# Altium PCB zulu_a7_hdi_optimized.PcbDoc (part 3 of 4)
Units mm, origin at the board's own origin, x right, y up, seen from the top; angles counter-clockwise.
Board outline 69.85 x 25.4 mm, 6 copper layers (Top Layer, L2-GND, L3-SIG, L4-SIG, L5-VCC3V3, Bottom Layer), stack 1.65 mm thick; 178 components, 177 nets, 839 pads, 1771 vias.
Unrouted connection lines stored in the file: 143.
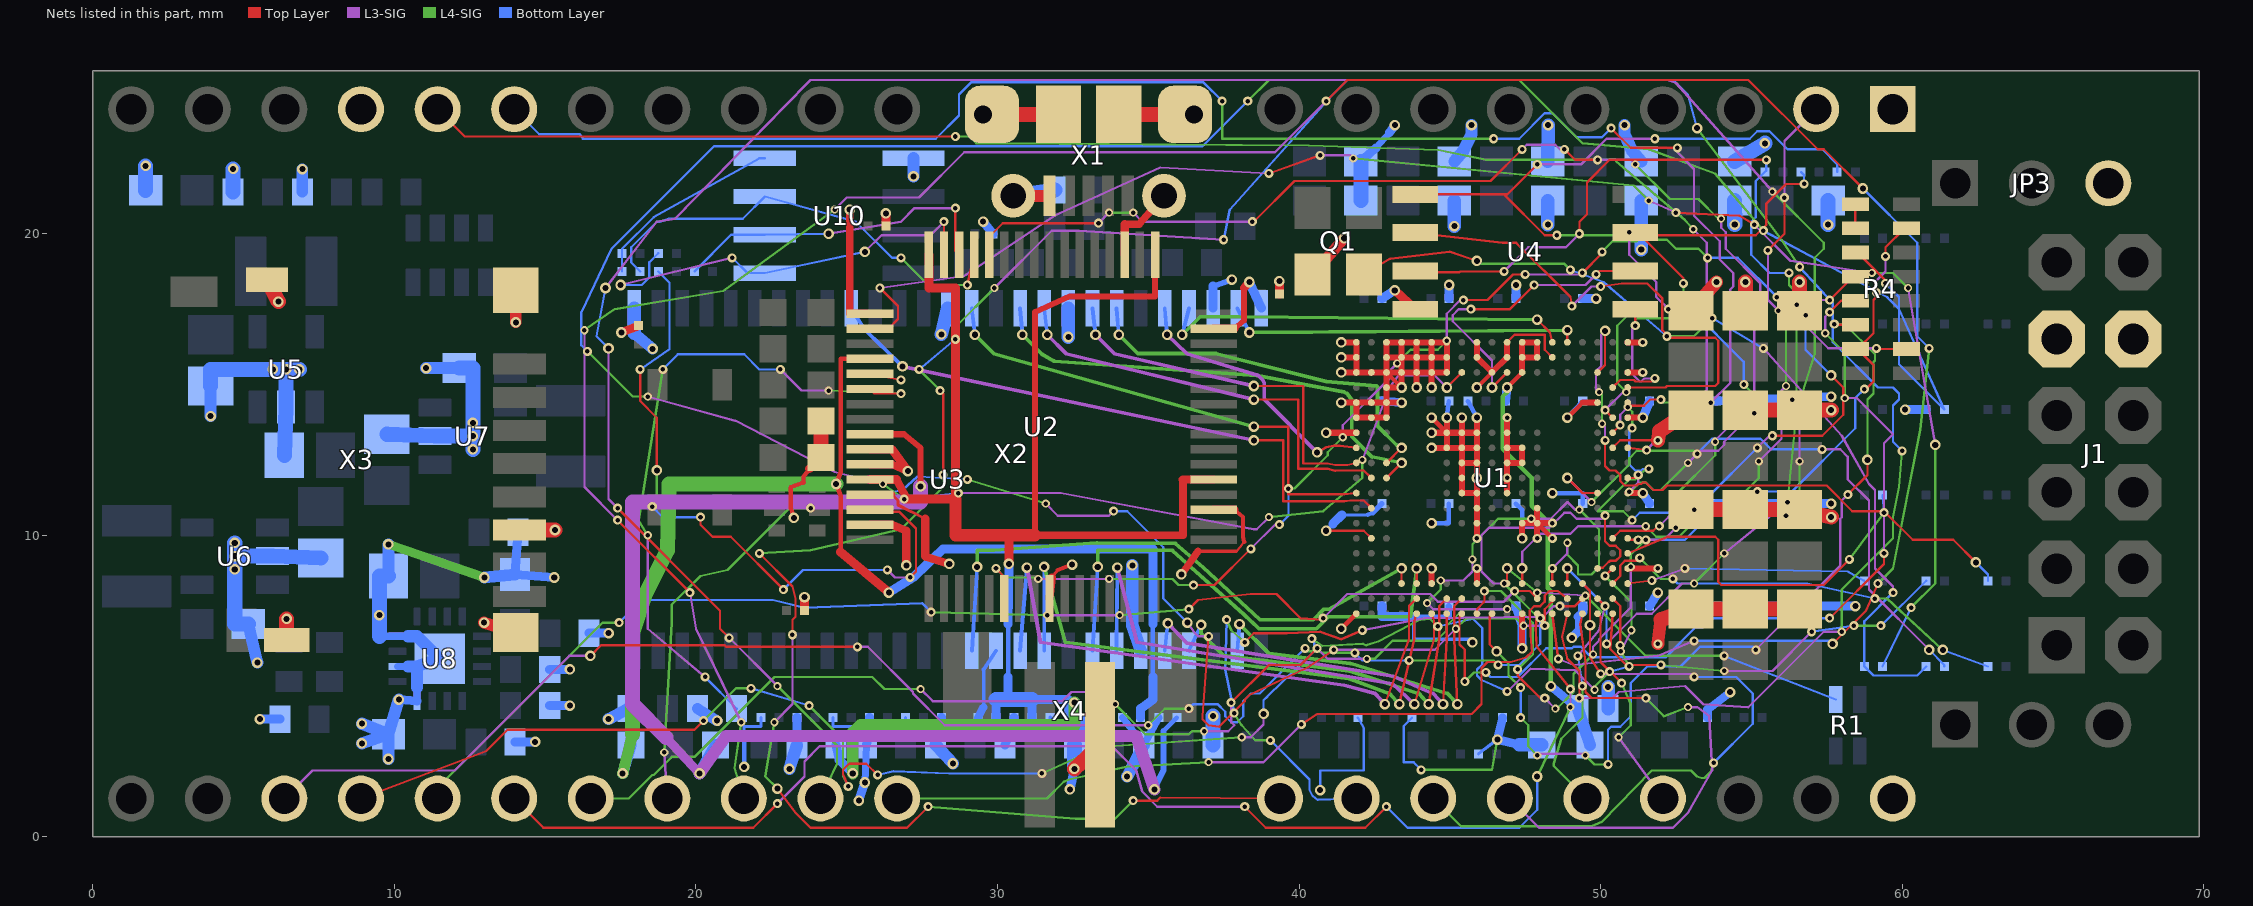
[diagram p6: the nets of this part, all layers, seen from the top]

## Via types
v1: diameter 0.35, hole 0.2, Top Layer to Bottom Layer, tented both sides, 392 vias
v2: diameter 0.27, hole 0.15, L3-SIG to L4-SIG, tented both sides, 363 vias
v3: diameter 0.3, hole 0.15, Top Layer to L2-GND, tented both sides, 292 vias
v4: diameter 0.3, hole 0.15, L2-GND to L3-SIG, tented both sides, 279 vias
v5: diameter 0.3, hole 0.15, L4-SIG to L5-VCC3V3, tented both sides, 223 vias
v6: diameter 0.3, hole 0.15, L5-VCC3V3 to Bottom Layer, tented both sides, 222 vias

## Nets (pads, with @x,y where several pads share a name; then routed paths per layer and width w, separated by ;. In a path a pad name is that pad's centre, name@x,y a point inside that pad or via, vN(x,y) a via of type N, cw(c..) or ccw(c..) an arc to the next point about the centre after c; other vN are vias at no path point) (continued)
CHAN12: U1.E19 X2.15 | length 55.2
  Top Layer w0.076: v3(50.35,23.5) 51,22.85 v3(52.55,22.85) ; U1.E19@50.9,14.4 51,14.3 51.45,14.3 51.65,14.5 v3(52,14.5)
  L3-SIG w0.076: v3(52.55,22.85) 52.55,22.7 53.1,22.15 53.1,20.6 53.95,19.75 53.95,19.15 54.4,18.7 54.4,18.25 54.3,18.15 54.3,15.05 v2(53.65,14.4)
  L4-SIG w0.076: v5(37.45,24.4) 37.45,23.15 v5(46.45,23.15) ; v3(52,14.5) 52.1,14.4 v2(53.65,14.4)
  Bottom Layer w0.076: X2.15@13.97,24.13 14.8,23.3 16.15,23.3 16.25,23.15 27.95,23.15 28.72,23.92 28.72,24.62 29.12,25.02 36.83,25.02 v5(37.45,24.4) ; v5(46.45,23.15) 47.3,23.15 48.15,24 48.4,24 49.2,23.2 50.05,23.2 v3(50.35,23.5)
  other v2: 52,14.5 50.35,23.5
  other v4: 52,14.5 52.55,22.85 50.35,23.5
  other v5: 50.35,23.5
  other v6: 46.45,23.15 50.35,23.5 37.45,24.4
CHAN13: U1.H19 X2.16 | length 52
  Top Layer w0.076: X2.16@11.43,24.13 12.335,23.225 v3(28.6,23.225) ; U1.H19@50.9,12.9 v3(51.525,12.825)
  L3-SIG w0.076: v3(51.525,12.825) 53.525,14.825 53.525,19.7 v2(53.075,20.15)
  L4-SIG w0.076: v3(28.6,23.225) 29.075,23.225 29.3,23 40.325,22.925 44.625,22.775 46.2,22.45 50.475,22.45 50.525,22.4 52.8,20.45 v2(53.075,20.15)
  other v2: 28.6,23.225
  other v4: 51.525,12.825 28.6,23.225
CHAN14: U1.W17 X2.24 | length 7.2
  Top Layer w0.076: U1.W17@49.9,7.4 50,7.3 50,5.8 v3(50.7,5.1)
  L3-SIG w0.076: v2(50.6,3.3) X2.24@52.07,1.27
  L4-SIG w0.076: v2(50.6,3.3) 51,3.7 51,4.4 v3(50.7,5.1)
  other v2: 50.7,5.1
  other v4: 50.7,5.1
CHAN15: U1.V17 X2.25 | length 7.8
  Top Layer w0.076: U1.V17@49.9,7.9 v3(50.15,7.65)
  L3-SIG w0.076: v2(49.25,6) 49.95,6.85 v3(50.15,7.65)
  L4-SIG w0.076: v5(49.4,5) 49.4,3.95 48.7,3.25 48.45,2.425 48.45,2.35 X2.25@49.53,1.27
  Bottom Layer w0.076: v2(49.25,6) v5(49.4,5)
  other v4: 50.15,7.65
  other v5: 49.25,6
  other v6: 49.4,5 49.25,6
CHAN16: U1.W16 X2.26 | length 17.1
  Top Layer w0.076: U1.W16@49.4,7.4 49.325,7.05 49.5,5.8 49.5,4.8 49.7,4.6 v3(51.5,4.6)
  L3-SIG w0.076: X2.26@46.99,1.27 47.96,0.3 52.4,0.3 52.9,0.8 53.7,2.2 53.6,4 53.2,4.3 v2(52.9,4.3)
  L4-SIG w0.076: v3(51.5,4.6) 52.1,4 v2(52.9,4.3)
  other v2: 51.5,4.6
  other v4: 51.5,4.6
CHAN17: U1.U16 X2.27 | length 22.2
  Top Layer w0.076: U1.U16@49.4,8.4 49.65,8.15 v1(49.65,7.02) 49.65,5.95 v3(50,5.4)
  L3-SIG w0.076: v3(50,5.4) 53,5.4 v2(53.1,5.3)
  L4-SIG w0.076: X2.27@44.45,1.27 45.37,0.35 49.7,0.35 50.05,0.5 51.7,2.2 53,2.2 53.2,2 53.35,1.95 53.45,1.95 53.65,2.15 v5(53.75,2.45)
  Bottom Layer w0.076: v2(53.1,5.3) 54.5,5.3 55.05,4.75 55.05,3.75 v5(53.75,2.45)
  other v4: 50,5.4
  other v5: 53.1,5.3
  other v6: 53.75,2.45 53.1,5.3
CHAN18: U1.V16 X2.28 | length 21.4
  Top Layer w0.076: v3(38.2,6.45) 38.5,6.75 39.6,6.75 40.7,6.8 41.4,6.55 v3(42.1,6.85) ; v3(48.65,7.65) 49.15,7.65 U1.V16@49.4,7.9
  L3-SIG w0.076: v3(42.1,6.85) 44.15,7.25 48.1,7.3 48.45,7.65 v3(48.65,7.65)
  L4-SIG w0.076: v5(37.6,7.2) 37.75,6.85 v3(38.2,6.45) ; v5(37.85,4.1) 38.1,3.7 38.55,3.2 v5(39.05,3.2)
  Bottom Layer w0.076: v5(37.6,7.2) 37.55,5.55 v5(37.85,4.1) ; v5(39.05,3.2) 40.35,1.9 40.35,1.55 40.45,1.35 40.625,1.225 X2.28@41.91,1.27
  other v2: 38.2,6.45
  other v4: 38.2,6.45 42.1,6.85 48.65,7.65
  other v6: 39.05,3.2 37.85,4.1 37.6,7.2
CHAN19: U1.W15 X2.29 | length 102.8
  Top Layer w0.076: v3(22.1,9.4) 23.2,8.3 23.3,7.9 23.3,7.3 23.2,7.2 v3(23.2,6.7) ; v1(22.7,1.6) 23.3,0.8 23.8,0.3 27,0.3 v3(27.7,1) ; v3(28.1,14.8) 28.2,14.7 v3(28.2,12) ; v3(34.5,1.2) 35.3,1.2 35.4,1.3 X2.29@39.37,1.27 ; U1.W15@48.9,7.4 48.725,6.625 48.9,5.9 49.3,5.5 v3(49.3,4.6)
  L3-SIG w0.076: v2(22.6,3.8) 23.2,4.4 v3(23.2,6.7) ; v2(29.9,18.2) 31.8,20.1 32.7,20.1 v2(37.5,19.8) ; v3(49.3,4.6) 50.4,4.6 50.6,4.8 52.8,5 53.4,4.4 54.9,4.3 57.4,6.8 v2(58,6.8)
  L4-SIG w0.076: v3(22.1,9.4) 23.8,9.5 26.8,10.2 28.2,11.6 v3(28.2,12) ; v2(22.6,3.8) 22.3,2 v1(22.7,1.6) ; v5(27.4,15.5) v3(28.1,14.8) ; v3(27.7,1) 32.6,0.6 33.9,0.6 v3(34.5,1.2) ; v5(28.6,16.5) 28.6,16.9 v2(29.9,18.2) ; v1(53.2,23.5) 56,19.8 v5(56.6,18.9) ; v2(58,6.8) 58,8.2 59.7,9.9 59.7,10.6 59.9,11.6 v5(60,12.8)
  Bottom Layer w0.076: v5(27.4,15.5) v5(28.6,16.5) ; v2(37.5,19.8) 37.7,20.8 41.1,24.6 41.6,25.1 52.4,25.1 52.9,24.6 v1(53.2,23.5) ; v5(56.6,18.9) 57.7,17.7 57.7,16.4 59.2,14.9 59.7,14.9 59.9,14.7 59.9,14.5 59.7,14.3 59.7,13.1 v5(60,12.8)
  other v2: 27.7,1 34.5,1.2 22.1,9.4 28.2,12 28.1,14.8
  other v4: 27.7,1 34.5,1.2 49.3,4.6 23.2,6.7 22.1,9.4 28.2,12 28.1,14.8
  other v5: 37.5,19.8
  other v6: 60,12.8 27.4,15.5 28.6,16.5 56.6,18.9 37.5,19.8
CHAN20: U1.V15 X2.30 | length 26.6
  Top Layer w0.076: v3(40.075,3.725) 40.6,4.075 45.725,4.075 46.05,4.4 46.05,5.6 46.25,5.8 47.025,5.8 47.525,5.95 47.725,6.125 47.675,6.7 47.65,7.475 47.65,7.5 47.8,7.65 48,7.65 48.15,7.8 48.15,8 48.3,8.15 48.575,8.15 U1.V15@48.9,7.9
  L3-SIG w0.076: v2(37,2.475) 38.825,2.475 v3(40.075,3.725)
  L4-SIG w0.076: X2.30@26.67,1.27 31.645,1.27 32.2,1.825 32.375,1.9 34.275,2.325 v2(37,2.475)
  other v4: 40.075,3.725
CHAN21: U1.U15 X2.31 | length 86.4
  Top Layer w0.076: v3(17.4,10.9) 20.8,7.5 20.8,6.9 v3(21.1,6.6) ; U1.U15@48.9,8.4 v1(48.9,8.9)
  L3-SIG w0.076: v1(17,18.2) 18.7,20.4 19.3,20.5 23.7,25 23.8,25.1 52.2,25.1 52.5,25 v2(55.7,21.4) ; v1(17.1,16.2) 17.1,11.2 v3(17.4,10.9) ; v3(21.1,6.6) v2(22.7,5) ; v2(50.2,6.4) 51.2,7.4 51.7,7.4 52.7,8.4 v2(53.1,8.4) ; v2(54.1,9.4) v2(56.2,11.1)
  L4-SIG w0.076: v2(22.7,5) 24.675,3.025 24.675,2.425 X2.31@24.13,1.27 ; v2(53.1,8.4) v2(54.1,9.4) ; v2(55.7,21.4) 57.4,19.7 57.4,19.5 57.1,19.2 57.1,16 56.5,14.1 v2(56.2,11.1)
  Bottom Layer w0.076: v1(17,18.2) 16.7,16.6 v1(17.1,16.2) ; v1(48.9,8.9) 50.2,7.6 v2(50.2,6.4)
  other v4: 21.1,6.6 17.4,10.9
  other v5: 50.2,6.4
  other v6: 50.2,6.4
CHAN22: U1.W14 X2.32 | length 91.9
  Top Layer w0.076: v3(17.4,10.5) v3(19.8,8.1) ; v3(40.9,24.4) 41.6,25.1 54.9,25.1 57.2,22.8 57.4,22.8 v1(58.7,21.5) ; U1.W14@48.4,7.4 v3(48.6,5.9) ; v1(57.7,6.4) 58.8,7.5 v3(59.2,8.4)
  L3-SIG w0.076: v2(16.3,16.8) 16.3,11.6 v3(17.4,10.5) ; v3(19.8,8.1) 20,6.9 v2(21.5,3.8) ; v2(24.6,20.8) 25,21.2 27.4,21.2 28.9,22.7 39.2,22.7 v3(40.9,24.4) ; v3(48.6,5.9) 49.1,5.7 51.9,6 v2(53.1,6.5)
  L4-SIG w0.076: v2(16.3,16.8) 17.3,17.5 20.9,18.1 v2(24.6,20.8) ; v2(21.5,3.8) 21.275,2.275 X2.32@21.59,1.27 ; v3(59.2,8.4) 59.7,8.9 60.6,13.5 v5(60.9,16.2)
  Bottom Layer w0.076: v2(53.1,6.5) 57.6,6.5 v1(57.7,6.4) ; v1(58.7,21.5) 60.5,19.7 60.5,16.6 v5(60.9,16.2)
  other v2: 59.2,8.4
  other v4: 48.6,5.9 19.8,8.1 59.2,8.4 17.4,10.5 40.9,24.4
  other v5: 53.1,6.5
  other v6: 53.1,6.5 60.9,16.2
CHAN23: U1.V14 X2.33 | length 45.4
  Top Layer w0.076: v3(37,6.65) 36.8,4 36.8,3.9 37,3.7 37.35,3.65 38.2,4.5 38.2,4.55 38.35,4.7 40.25,5.6 v3(41.15,6.2) ; v3(48.15,7) 48.15,7.55 48.4,7.8 U1.V14@48.4,7.9
  L3-SIG w0.076: v2(18.95,2.8) X2.33@19.05,1.27 ; v2(31.6,11.05) 32,10.65 33.7,10.65 v2(33.85,10.8) ; v1(36.3,7.1) 36.55,6.75 36.65,6.65 v3(37,6.65) ; v3(41.15,6.2) 44.5,6.2 v2(45.2,6.9) ; v2(47.45,7) v3(48.15,7)
  L4-SIG w0.076: v2(18.95,2.8) 19.2,7.1 19.2,7.7 20.15,8.65 21.05,8.85 23.1,10.9 v5(23.8,10.9) ; v5(29,11.85) v2(31.6,11.05) ; v2(45.2,6.9) 45.55,7.25 47.2,7.25 v2(47.45,7)
  Bottom Layer w0.076: v5(23.8,10.9) 26.85,11.5 27.35,11.95 v5(29,11.85) ; v2(33.85,10.8) 34.3,10.8 35.5,9.6 35.5,7.9 v1(36.3,7.1)
  other v4: 41.15,6.2 37,6.65 48.15,7
  other v5: 33.85,10.8
  other v6: 33.85,10.8 23.8,10.9 29,11.85
CHAN24: U1.U14 X2.34 | length 51.5
  Top Layer w0.076: v3(37.75,4.45) 39,5.7 40.05,5.7 v3(40.6,6.25) ; U1.U14@48.4,8.4 v3(48.4,8.9)
  L3-SIG w0.076: v2(27.45,4.9) 27.85,4.5 32.15,4.5 32.45,4.8 33.5,4.8 v2(33.9,4.4) ; v2(36.85,3.5) 37.65,3.5 37.85,3.7 37.75,3.8 v3(37.75,4.45) ; v3(40.6,6.25) 40.95,5.9 v2(42.25,5.9) ; v2(44.25,7.75) 44.45,7.55 v2(46.9,7.55) ; v2(44.7,8.5) 45.45,8.5 45.75,8.8 v2(45.75,9.2) ; v2(47.7,10.55) 48.35,10.55 48.9,11.1 49.15,10.85 v2(49.3,10.85) ; v3(48.4,8.9) 48.9,9.4 v2(48.9,9.75)
  L4-SIG w0.076: X2.34@16.51,1.27 17.77,1.27 18.55,2.05 18.6,2.05 19.2,2.65 19.95,2.65 22.6,5.3 25.85,5.3 26.25,4.9 v2(27.45,4.9) ; v2(33.9,4.4) 34.9,3.4 36.35,3.4 36.45,3.5 v2(36.85,3.5) ; v2(42.25,5.9) 42.5,5.9 43.1,6.5 44.55,6.5 44.9,6.85 44.9,7 45.45,7.55 v2(46.9,7.55) ; v2(44.25,7.75) 44.7,8.2 v2(44.7,8.5) ; v2(45.75,9.2) 45.75,9.7 46.6,10.55 v2(47.7,10.55) ; v2(48.9,9.75) 48.9,9.35 49.25,9 49.25,8.7 49.7,8.7 49.95,8.95 49.95,10.2 v2(49.3,10.85)
  other v4: 37.75,4.45 40.6,6.25 48.4,8.9
CHAN25: U1.W13 X2.35 | length 45.1
  Top Layer w0.076: X2.35@13.97,1.27 14.94,0.3 21.9,0.3 v3(22.7,1.1) ; v3(38.2,1) 38.9,0.3 42.2,0.3 v3(42.9,1) ; U1.W13@47.9,7.4 47.85,6.975 47.875,6.325 v3(49,4.9)
  L3-SIG w0.076: v3(22.7,1.1) 23.6,2 23.6,2.5 24.1,3 33.8,3 34.6,2.2 34.8,1.5 35.3,1 v3(38.2,1) ; v2(49,4.3) v3(49,4.9)
  L4-SIG w0.076: v1(47.9,2) v2(49,4.3)
  Bottom Layer w0.076: v3(42.9,1) 43.6,0.3 47.3,0.3 47.9,0.9 v1(47.9,2)
  other v2: 42.9,1
  other v4: 38.2,1 42.9,1 22.7,1.1 49,4.9
  other v5: 42.9,1
  other v6: 42.9,1
CHAN26: U1.V13 X2.36 | length 40.7
  Top Layer w0.076: v3(36.35,7.55) 36.65,7.85 38.4,8.05 39.25,8.05 40.05,7.25 40.75,7.2 v3(40.8,7.25) ; v3(47.15,8.15) 47.65,8.15 U1.V13@47.9,7.9
  L3-SIG w0.076: v2(31.65,7.35) v2(34.05,7.35) ; v3(40.8,7.25) 41.6,8.05 44.35,8.05 44.6,7.8 46.8,7.8 v3(47.15,8.15)
  L4-SIG w0.076: X2.36@11.43,1.27 11.43,1.63 16.9,7.1 v5(17.45,7.1) ; v5(27.8,7.45) v2(31.65,7.35) ; v2(34.05,7.35) v3(36.35,7.55)
  Bottom Layer w0.076: v5(17.45,7.1) 18.2,7.85 22.55,7.85 23.6,7.6 27.5,7.75 v5(27.8,7.45)
  other v2: 36.35,7.55
  other v4: 40.8,7.25 36.35,7.55 47.15,8.15
  other v6: 17.45,7.1 27.8,7.45
CHAN27: U1.T18 X2.37 | length 55.8
  Top Layer w0.076: X2.37@8.89,1.27 13.05,2.85 13.75,3.55 19.95,3.55 v3(20.25,3.85) ; v3(25.05,1.675) 24.875,2.075 24.875,2.225 25.075,2.425 25.65,2.425 v3(26.025,2.05) ; v3(50.15,8.65) U1.T18@50.4,8.9
  L3-SIG w0.076: v2(38.1,3.3) 38.4,3.3 38.825,3.725 v1(38.825,4.075) ; v2(46.9,4.825) 46.925,4.825 47.675,5.575 49.15,5.525 v2(49.8,4.875) ; v2(50.675,6.15) v2(51.025,6.85)
  L4-SIG w0.076: v3(20.25,3.85) 21.325,4.925 v5(21.825,4.925) ; v5(23.75,4.35) 24.875,3.225 24.875,2 v3(25.05,1.675) ; v5(31.475,2.1) 33.425,2.975 v2(38.1,3.3) ; v5(40.425,6.575) 40.775,6.325 42.125,6.4 42.225,6.35 42.625,6.475 44.025,7.2 44.35,7.225 v5(44.6,6.975) ; v2(49.8,4.875) 49.8,4.975 v5(50.3,5.475) ; v3(50.15,8.65) 51.025,7.775 v2(51.025,6.85) ; v2(50.675,6.15) v5(50.95,5.65)
  Bottom Layer w0.076: v5(21.825,4.925) v5(23.75,4.35) ; v3(26.025,2.05) 26.55,2.175 28.4,2.1 v5(31.475,2.1) ; v1(38.825,4.075) 38.825,4.525 38.95,4.65 40.5,6.15 40.5,6.5 v5(40.425,6.575) ; v5(44.6,6.975) 45.6,7.2 45.775,7.225 46.075,6.925 46.075,5.725 45.9,5.55 45.9,5.35 46.05,5.2 v2(46.9,4.825) ; v5(50.3,5.475) v5(50.95,5.65)
  other v2: 25.05,1.675 26.025,2.05 20.25,3.85 50.15,8.65
  other v4: 25.05,1.675 26.025,2.05 20.25,3.85 50.15,8.65
  other v5: 26.025,2.05 46.9,4.825
  other v6: 26.025,2.05 31.475,2.1 23.75,4.35 46.9,4.825 21.825,4.925 50.3,5.475 50.95,5.65 40.425,6.575 44.6,6.975
CHAN28: U1.T17 X2.38 | length 59.1
  Top Layer w0.076: v1(16.5,6) 16.85,6.35 20.95,6.35 21,6.3 v3(25.35,6.3) ; U1.T17@49.9,8.9 49.925,8.925 50.075,8.925 50.275,9.125 50.3,9.125 50.325,9.15 50.5,9.15 50.65,9.3 50.65,9.5 50.5,9.65 50.3,9.65 50.15,9.8 v3(50.15,10.65)
  L3-SIG w0.076: X2.38@6.35,1.27 7.28,2.2 12,2.2 15.8,6 v1(16.5,6) ; v3(25.35,6.3) 25.7,6.3 27.2,4.8 27.2,4.75 28.25,3.7 v2(35,3.7) ; v2(46.8,8.4) 46.45,8.4 46.05,8.8 46.05,10 46.3,10.25 48.3,10.25 48.8,10.75 49,10.75 49.2,10.55 50.05,10.55 v3(50.15,10.65)
  L4-SIG w0.076: v2(35,3.7) 35.55,4.25 v5(36.35,4.25) ; v5(40.2,6.25) 40.3,6.15 40.7,6.15 40.75,6.1 v5(41.85,6.1) ; v5(43.65,5.85) 46.45,5.85 v5(46.6,5.7) ; v2(46.8,8.4) 47.95,7.25 v5(48,7.25)
  Bottom Layer w0.076: v5(36.35,4.25) 36.5,4.4 37.3,4.4 37.55,4.15 37.55,4 37.75,3.8 37.95,3.8 38.15,4 38.15,4.5 38.4,4.75 38.7,4.75 v5(40.2,6.25) ; v5(41.85,6.1) 42.1,5.85 v5(43.65,5.85) ; v5(46.6,5.7) 47.3,5.7 48,6.4 v5(48,7.25)
  other v4: 25.35,6.3 50.15,10.65
  other v6: 36.35,4.25 46.6,5.7 43.65,5.85 41.85,6.1 40.2,6.25 48,7.25
CHAN-CLK: U1.P18 X2.2 | length 19.2
  Top Layer w0.076: U1.P18@50.4,9.9 50.65,10.15 51.75,10.15 51.9,10.3 v3(51.95,10.3) ; v3(55.55,19.45) 56.1,20 v3(56.1,21.2)
  L3-SIG w0.076: v3(51.95,10.3) 52.5,10.85 v2(53.1,10.85) ; v2(55.25,12.45) 56,13.2 56,14.8 v2(56.15,14.95) ; v3(55.55,19.45) 55.55,17.8 v2(55.9,17.45) ; v3(56.1,21.2) 56.1,23.08 X2.2@57.15,24.13
  L4-SIG w0.076: v2(53.1,10.85) 54.2,10.85 55.25,11.9 v2(55.25,12.45) ; v2(55.9,17.45) 56.15,17.2 v2(56.15,14.95)
  other v4: 51.95,10.3 55.55,19.45 56.1,21.2
CKE: U1.M2 U3.37 | length 20.5
  Top Layer w0.076: v1(38.5,13.15) 39.479,13.15 39.479,11.13 40.9,11.13 41.5,11.13 41.688,11.15 42.15,11.15 U1.M2@42.4,10.9
  L3-SIG w0.125: v1(26.85,15.6) v1(38.5,13.15)
  Bottom Layer w0.125: U3.37@25.15,17.53 25.575,16.85 v1(26.85,15.6)
CLK-12M-FPGA: R25.2 U1.L17 | length 20.4
  Top Layer w0.076: v1(48.9,11.9) 49.4,11.4 U1.L17@49.9,11.4
  L3-SIG w0.076: v1(48.9,11.9) v2(49.7,11.1) ; v2(57.35,12.85) 57.95,12.85 58.2,12.6 58.2,11.85 58.9,11.15 58.9,8.2 v1(60.9,6.2)
  L4-SIG w0.076: v2(49.7,11.1) 50.95,12.35 50.95,12.55 51.2,12.8 53.1,12.8 v5(53.2,12.7)
  Bottom Layer w0.076: v5(53.2,12.7) 53.7,13.2 55.3,13.2 55.65,12.85 v2(57.35,12.85) ; v1(60.9,6.2) 61.4,5.7 R25.2@61.4,5.65
  other v5: 57.35,12.85
  other v6: 53.2,12.7 57.35,12.85
CLK-12M-FT: R24.2 U2.2 | length 51.9
  Top Layer w0.076: U2.2@25.775,16.85 26.375,16.85 26.7,17.175 26.7,17.6 v3(26.1,18.2) ; v3(39,22) v3(40.7,22.6) ; v3(52.5,20.7) 54.6,20.6 v3(55.1,20.3)
  L3-SIG w0.076: v3(26.1,18.2) 28.9,18.6 31.9,20.6 35.4,22.2 v3(39,22) ; v3(40.7,22.6) 41.7,22.6 v2(41.8,22.5) ; v2(51.6,21.1) v3(52.5,20.7) ; v3(55.1,20.3) 56.3,19.1 v2(59,18.7) ; v2(60.2,18.2) v1(61.1,13)
  L4-SIG w0.076: v2(41.8,22.5) 51.1,21.6 v2(51.6,21.1) ; v2(59,18.7) 59.7,18.7 v2(60.2,18.2) ; v5(60.3,7.6) 61.1,8.4 v1(61.1,13)
  Bottom Layer w0.076: R24.2@59.35,5.65 v5(60.3,7.6)
  other v4: 26.1,18.2 55.1,20.3 52.5,20.7 39,22 40.7,22.6
  other v6: 60.3,7.6
CLK-12M-SHARED: Q1.3 R24.1 R25.1 | length 29.6
  Top Layer w0.076: Q1.3@42.15,18.65 43.025,19.175 45,19.4 v1(45.9,19.1)
  L3-SIG w0.076: v2(55.4,16.2) 58,13.3 58.9,11.7 59.1,11.5 59.1,8.9 59.7,8.3 v2(59.7,8.1)
  L4-SIG w0.076: v1(45.9,19.1) 46,19 48.8,19 v5(49,18.8) ; v5(52.2,16.6) 53.1,16.6 v5(53.7,17.2)
  Bottom Layer w0.076: v5(49,18.8) 50.1,18.4 v5(52.2,16.6) ; v5(53.7,17.2) v2(55.4,16.2) ; v2(59.7,8.1) 58.75,7.15 R24.1@58.75,5.65 59.05,5.35 60.5,5.35 R25.1@60.8,5.65
  other v5: 59.7,8.1 55.4,16.2
  other v6: 59.7,8.1 55.4,16.2 52.2,16.6 53.7,17.2 49,18.8
D0: U1.V8 U3.2 | length 12.4
  Top Layer w0.076: v1(45.25,4.4) 45.15,6.55 45.15,7.187 45.15,7.65 U1.V8@45.4,7.9
  L4-SIG w0.125: v1(38.025,7.05) 39,6.075 41.7,5.75 44.925,4.75 v1(45.25,4.4)
  Bottom Layer w0.125: U3.2@37.95,6.17 v1(38.025,7.05)
D1: U1.V7 U3.4 | length 13
  Top Layer w0.076: v1(44.3,4.4) 44.65,6.55 44.65,7.187 44.65,7.65 U1.V7@44.9,7.9
  L4-SIG w0.125: v1(36.75,7.025) 36.75,6.75 37.475,6.025 41.675,5.5 43.975,4.75 v1(44.3,4.4)
  Bottom Layer w0.125: U3.4@36.35,6.17 v1(36.75,7.025)
D2: U1.W7 U3.5 | length 13.7
  Top Layer w0.076: v1(44.775,4.4) 44.9,6.55 U1.W7@44.9,7.4
  L3-SIG w0.125: v1(35.65,7.075) 36.275,6.425 43.125,5.325 44.45,4.75 v1(44.775,4.4)
  Bottom Layer w0.125: U3.5@35.55,6.17 v1(35.65,7.075)
D3: U1.W6 U3.7 | length 18
  Top Layer w0.076: v1(43.825,4.4) 44.475,6.55 44.475,7.15 U1.W6@44.4,7.4
  L3-SIG w0.125: v1(33.975,8.925) 34.625,6.45 43.1,5.075 v1(43.825,4.4)
  Bottom Layer w0.125: U3.7@33.95,6.17 v1(33.975,8.925)
D4: U1.U5 U3.8 | length 17
  Top Layer w0.076: U1.U5@43.9,8.4 v1(43.9,8.9)
  L4-SIG w0.125: v1(33.325,8.95) 33.325,9.5 33.875,9.5 35.8,9.5 38.175,7.375 38.675,6.9 40.575,6.9 40.975,7.3 43.675,7.3 43.7,7.325 v1(43.9,8.9)
  Bottom Layer w0.125: U3.8@33.15,6.17 v1(33.325,8.95)
D5: U1.W5 U3.10 | length 19.8
  Top Layer w0.076: v1(43.325,4.4) 43.825,6.55 43.825,7.15 U1.W5@43.9,7.4
  L4-SIG w0.125: v1(31.55,8.95) 32.25,6.45 41.65,5.25 43,4.75 v1(43.325,4.4)
  Bottom Layer w0.125: U3.10@31.55,6.17 v1(31.55,8.95)
D6: U1.V5 U3.11 | length 20.7
  Top Layer w0.076: v1(42.85,4.4) 43.65,6.55 43.65,7.187 43.65,7.65 U1.V5@43.9,7.9
  L3-SIG w0.125: v1(30.975,8.925) 31.425,6.45 41.5,5.025 42.525,4.75 v1(42.85,4.4)
  Bottom Layer w0.125: U3.11@30.75,6.17 v1(30.975,8.925)
D7: U1.U4 U3.13 | length 19.4
  Top Layer w0.076: U1.U4@43.4,8.4 v1(43.4,8.9)
  L4-SIG w0.125: v1(29.325,8.95) 29.325,9.5 29.875,9.5 33.3,9.75 35.9,9.725 36.825,8.925 38.7,7.2 40.475,7.2 40.825,7.55 41,7.55 v1(43.4,8.9)
  Bottom Layer w0.125: U3.13@29.15,6.17 v1(29.325,8.95)
D8: U1.L1 U3.42 | length 16.4
  Top Layer w0.076: v1(38.5,13.6) 39.646,13.6 39.646,11.36 40.9,11.36 41.5,11.36 U1.L1@41.9,11.4
  L4-SIG w0.125: v1(29.25,16.65) 29.875,16.025 v1(38.5,13.6)
  Bottom Layer w0.125: U3.42@29.15,17.53 v1(29.25,16.65)
D9: U1.K3 U3.44 | length 16.2
  Top Layer w0.076: U1.K3@42.9,11.9 v1(43.4,12.4)
  L4-SIG w0.125: v1(30.825,16.65) 31.45,16.025 31.875,15.775 38.6,15.3 41.5,14.75 41.6,14.7 41.75,14.5 41.75,13.275 42.425,12.6 v1(43.4,12.4)
  Bottom Layer w0.125: U3.44@30.75,17.53 v1(30.825,16.65)
D10: U1.K2 U3.45 | length 14.5
  Top Layer w0.076: v1(38.5,14.5) 39.979,14.5 39.979,12.21 40.9,12.21 40.95,12.205 41.2,12.14 41.688,12.15 42.15,12.15 U1.K2@42.4,11.9
  L3-SIG w0.125: v1(31.65,16.65) 32.275,16.025 v1(38.5,14.5)
  Bottom Layer w0.125: U3.45@31.55,17.53 v1(31.65,16.65)
D11: U1.J1 U3.47 | length 12.5
  Top Layer w0.076: v1(38.5,14.95) 40.145,14.95 40.145,12.38 40.95,12.38 41.2,12.33 41.6,12.33 U1.J1@41.9,12.4
  L3-SIG w0.125: v1(33.25,16.65) 33.875,16.025 v1(38.5,14.95)
  Bottom Layer w0.125: U3.47@33.15,17.53 v1(33.25,16.65)
D12: U1.J3 U3.48 | length 12.9
  Top Layer w0.076: U1.J3@42.9,12.4 v1(43.4,12.9)
  L4-SIG w0.125: v1(34.025,16.65) 34.65,16.025 37.25,16.025 40.9,15.1 42.575,14.95 42.6,14.925 42.6,13.625 43.225,13 v1(43.4,12.9)
  Bottom Layer w0.125: U3.48@33.95,17.53 v1(34.025,16.65)
D13: U1.H1 U3.50 | length 9
  Top Layer w0.076: v1(40.6,12.75) 40.9,12.92 41.15,12.97 41.35,12.97 U1.H1@41.9,12.9
  L3-SIG w0.125: v1(35.625,16.65) 36.275,16.025 38.65,15.3 38.8,15.15 38.85,15.05 38.85,14.5 v1(40.6,12.75)
  Bottom Layer w0.125: U3.50@35.55,17.53 v1(35.625,16.65)
D14: U1.A14 U3.51 | length 13.9
  Top Layer w0.076: v1(47.9,17.15) 48.325,16.725 U1.A14@48.4,16.4
  L4-SIG w0.125: v1(36.125,16.65) 36.725,17.25 38,17.25 v1(47.9,17.15)
  Bottom Layer w0.125: v1(36.125,16.65) U3.51@36.35,17.53
D15: U1.A15 U3.53 | length 11.8
  Top Layer w0.076: U1.A15@48.9,16.4 v1(48.9,16.8)
  L4-SIG w0.125: v1(38.35,16.725) v1(48.9,16.8)
  Bottom Layer w0.125: U3.53@37.95,17.53 v1(38.35,16.725)
DONE: R4.2 U2.22 | length 39.3
  Top Layer w0.076: v3(29.95,8.9) 30.225,8.625 U2.22@30.225,7.9 ; v3(36.5,8.35) 37.2,8.35 v3(38.4,9.55) ; v3(45.45,17.8) 46.25,17.8 47.1,18.65 v3(47.5,18.65) ; v3(49.4,18.7) 50.05,19.35 v3(50.05,19.4) ; v3(59.15,16.2) 59.172,16.178 R4.2@60.15,16.178
  L3-SIG w0.076: v2(31.35,8.55) v2(33.7,8.55) ; v3(38.4,9.55) 39.2,10.35 v2(39.35,10.35) ; v2(41.45,13.25) 41.45,13.65 43.05,15.25 43.05,15.5 v2(43.25,15.7) ; v2(44.9,16.45) 44.9,17.35 45.35,17.8 v3(45.45,17.8) ; v3(47.5,18.65) 49.35,18.65 v3(49.4,18.7) ; v2(55.85,17.9) 57.55,16.2 v3(59.15,16.2)
  L4-SIG w0.076: v3(29.95,8.9) 30.25,8.6 31.3,8.6 v2(31.35,8.55) ; v2(33.7,8.55) 35.8,8.55 36,8.35 v3(36.5,8.35) ; v5(39.65,11.55) 39.85,11.55 40.95,12.65 40.95,12.75 v2(41.45,13.25) ; v2(43.25,15.7) 43.7,16.15 44.6,16.15 v2(44.9,16.45) ; v3(50.05,19.4) 50.4,19.75 51.2,19.75 51.25,19.8 52.2,19.8 52.5,19.5 53.25,19.5 v5(53.55,19.2)
  Bottom Layer w0.076: v2(39.35,10.35) 39.65,10.65 v5(39.65,11.55) ; v5(53.55,19.2) 54.55,19.2 v2(55.85,17.9)
  other v2: 36.5,8.35 29.95,8.9 50.05,19.4
  other v4: 36.5,8.35 29.95,8.9 38.4,9.55 59.15,16.2 45.45,17.8 47.5,18.65 49.4,18.7 50.05,19.4
  other v5: 39.35,10.35 55.85,17.9
  other v6: 39.35,10.35 39.65,11.55 55.85,17.9 53.55,19.2
DONE-PU: R4.9 R4.10 | length 0.8
  Top Layer w0.076: R4.10@58.45,20.178 R4.9@58.45,20.978
EE-CLK: R96.1 U2.62 U10.2 | length 11
  Top Layer w0.076: v3(28.6,20.85) 28.6,19.425 U2.62@28.725,19.3
  L3-SIG w0.076: v1(24.4,20) 26.8,20.4 27.25,20.85 v3(28.6,20.85)
  Bottom Layer w0.076: R96.1@19.95,18.75 21.165,19.965 U10.2@22.285,19.965 v1(24.4,20)
  other v4: 28.6,20.85
EE-CS: R98.1 U2.63 U10.1 | length 14.6
  Top Layer w0.076: U2.63@28.225,19.3 v3(28.225,20.4)
  L3-SIG w0.076: v1(17.5,18.3) v2(21.2,19.2) ; v1(25.6,19.4) 26.15,19.95 27.775,19.95 v3(28.225,20.4)
  Bottom Layer w0.076: v1(17.5,18.3) 18.2,18.3 18.45,18.55 18.45,19.05 R98.1@18.75,19.35 ; v2(21.2,19.2) 21.705,18.695 U10.1@22.285,18.695 v1(25.6,19.4)
  other v4: 28.225,20.4
  other v5: 21.2,19.2
  other v6: 21.2,19.2
EE-DATA: R101.2 U2.61 U10.3 | length 14.8
  Top Layer w0.076: v3(29,18.3) U2.61@29.225,19.3
  L4-SIG w0.076: v5(26.8,19.2) 27.7,18.3 v3(29,18.3)
  Bottom Layer w0.076: R101.2@18.15,18.75 17.85,19.05 17.85,19.55 18.7,20.4 18.8,20.4 19.1,20.5 21.55,20.5 U10.3@22.285,21.235 25.3,20.4 26.5,19.2 v5(26.8,19.2)
  other v2: 29,18.3
  other v4: 29,18.3
  other v6: 26.8,19.2
EE-DATA-DO: R97.1 R101.1 U10.4 | length 6.4
  Bottom Layer w0.076: R101.1@17.55,18.75 R97.1@17.55,19.35 17.55,19.5 18.6,20.55 22.1,22.5 U10.4@22.285,22.505
FLASH-CS#: R7.1 U1.K19 U4.1 | length 35
  Top Layer w0.076: U4.1@43.85,21.305 46.795,21.305 ; v3(47.9,22.3) 46.905,21.305 46.795,21.305 ; v3(48.55,19.95) 48.15,19.95 46.795,21.305 ; U1.K19@50.9,11.9 51.15,11.9 v3(51.25,12)
  L3-SIG w0.076: v3(47.9,22.3) 49.35,22.3 50.2,23.15 v2(51.8,23.15) ; v2(50.95,11.45) 51.25,11.75 v3(51.25,12) ; v2(50.95,20.05) 50.95,19.3 51.85,18.4 51.85,17.9 v2(52.25,17.5) ; v2(52.9,12.4) 53.3,12.8 53.9,12.8 54.1,13 54.1,13.1 55.05,14.05 v2(55.1,14.05)
  L4-SIG w0.076: v3(48.55,19.95) 50.85,19.95 v2(50.95,20.05) ; v2(50.95,11.45) 51,11.45 51.3,11.75 51.5,11.75 51.75,11.5 52,11.5 v2(52.9,12.4) ; v5(54.75,15) 55.1,14.65 v2(55.1,14.05)
  Bottom Layer w0.076: v2(51.8,23.15) 54.95,23.15 55.2,23.4 55.6,23.4 56.2,22.8 57.35,22.8 57.85,22.3 R7.1@57.849,22.05 ; v2(52.25,17.5) 53,17.5 54.75,15.75 v5(54.75,15)
  other v2: 48.55,19.95
  other v4: 51.25,12 48.55,19.95 47.9,22.3
  other v5: 52.25,17.5 51.8,23.15
  other v6: 54.75,15 52.25,17.5 51.8,23.15
FLASH-D00: U1.D18 U4.5 | length 4.6
  Top Layer w0.076: U1.D18@50.4,14.9 50.65,15.15 51.112,15.15 51.163,15.1 51.35,15.1 51.7,15.1 v3(51.8,15.2) ; v3(51.15,16.95) U4.5@51.15,17.495
  L3-SIG w0.076: v3(51.15,16.95) 51.05,16.85 51.05,15.35 51.3,15.1 51.35,15.1 51.45,15.2 v3(51.8,15.2)
  other v4: 51.8,15.2 51.15,16.95
FLASH-D01: U1.D19 U4.2 | length 17.2
  Top Layer w0.076: U4.2@43.85,20.035 46.75,19.7 47.2,19.7 49,17.9 v3(49.05,17.6) ; v3(50,18.25) 50.7,18.35 51.55,18.35 52.05,17.85 52.05,16.8 52.3,16.55 53.8,16.55 53.9,16.45 53.9,15.05 53.8,14.95 52.2,14.95 52.15,14.9 U1.D19@50.9,14.9
  L3-SIG w0.076: v3(49.05,17.6) 49.7,18.25 v3(50,18.25)
  other v4: 49.05,17.6 50,18.25
FLASH-D02: R2.1 U1.G18 U4.3 | length 40.4
  Top Layer w0.076: U4.3@43.85,18.765 43.89,18.725 45.325,18.725 45.35,18.75 v3(46.8,18.75) ; v3(49.3,20) 49.3,20.4 49.55,20.65 49.55,21.7 50.3,22.45 v3(55.5,22.45) ; U1.G18@50.4,13.4 v3(50.65,13.65) ; v3(55.7,13.3) 57.35,13.3 58.05,14 58.05,14.9 v1(57.65,15.3)
  L3-SIG w0.076: v3(46.8,18.75) 47.6,19.55 48.85,19.55 v3(49.3,20) ; v3(50.65,13.65) 50.65,14 v2(50.9,14.25) ; v2(55.2,12.9) 55.6,13.3 v3(55.7,13.3)
  L4-SIG w0.076: v2(50.9,14.25) 51.05,14.1 v5(51.05,13.55) ; v5(51.05,10.5) 50.75,10.8 49.9,10.8 50.95,11.85 51.15,11.85 51.5,12.2 v5(51.6,12.2) ; v5(56.25,18.7) 56.25,18.3 56.8,17.75 v5(56.8,17.3)
  Bottom Layer w0.076: v5(51.05,10.5) 51.3,10.75 53.45,10.75 53.55,10.85 53.55,11.25 v2(55.2,12.9) ; v5(51.05,13.55) 50.95,13.45 50.95,12.35 51.15,12.15 51.35,12.15 51.4,12.2 v5(51.6,12.2) ; v3(55.5,22.45) 55.5,22.101 R2.1@55.449,22.05 55.15,21.751 55.15,20.55 55,20.4 55,19.3 55.6,18.7 v5(56.25,18.7) ; v5(56.8,17.3) 56.8,16.15 v1(57.65,15.3)
  other v2: 55.5,22.45
  other v4: 55.7,13.3 50.65,13.65 46.8,18.75 49.3,20 55.5,22.45
  other v5: 55.2,12.9 55.5,22.45
  other v6: 51.05,10.5 51.6,12.2 55.2,12.9 51.05,13.55 56.8,17.3 56.25,18.7 55.5,22.45
FLASH-D03: R6.1 U1.F18 U4.7 | length 16.5
  Top Layer w0.076: v3(50.15,14.15) U1.F18@50.4,13.9 ; v3(52.75,18.35) 52.75,18.525 51.24,20.035 U4.7@51.15,20.035 51.235,19.95 55.15,19.95 55.5,20.3 55.5,21 56.15,21.65 v3(56.75,21.65)
  L3-SIG w0.076: v3(50.15,14.15) 50.75,14.75 v2(50.85,14.75)
  L4-SIG w0.076: v2(50.85,14.75) 50.55,15.05 50.55,16.95 50.9,17.3 51.1,17.3 51.2,17.2 52.35,17.2 52.75,17.6 v3(52.75,18.35)
  Bottom Layer w0.076: R6.1@56.649,22.05 56.75,21.949 v3(56.75,21.65)
  other v2: 52.75,18.35 56.75,21.65
  other v4: 50.15,14.15 52.75,18.35 56.75,21.65
  other v5: 56.75,21.65
  other v6: 56.75,21.65
FPGA-CCLK: U1.C11 U4.6 | length 10.3
  Top Layer w0.076: v3(45.7,17.5) 47,17.5 v3(47.8,18.3) ; v1(46.4,14.9) U1.C11@46.9,15.4 ; v3(49.85,18.65) 49.965,18.765 U4.6@51.15,18.765
  L3-SIG w0.076: v3(45.7,17.5) 45.3,17.5 45.1,17.3 45.1,17.1 46.4,15.8 v1(46.4,14.9) ; v3(47.8,18.3) 49.5,18.3 v3(49.85,18.65)
  other v4: 45.7,17.5 47.8,18.3 49.85,18.65
FPGA-DONE: R4.7 R4.15 U1.U12 | length 22
  Top Layer w0.076: U1.U12@47.4,8.4 v1(47.4,8.9) ; R4.15@58.45,16.178 R4.15@58.522,16.178 ; v3(58.75,14.85) 58.8,14.85 59.05,15.1 59.05,15.65 R4.15@58.522,16.178 ; v3(59.15,18.05) 59.15,17.9 59.05,17.8 59.05,16.7 R4.15@58.522,16.178 ; v3(59.45,19.25) 59.45,19.55 60.078,20.178 R4.7@60.15,20.178
  L3-SIG w0.076: v1(47.4,8.9) 47.4,9.45 48,10.05 49,10.05 49.25,10.3 v2(51.5,10.3) ; v3(59.15,18.05) 59.15,18.45 59.45,18.75 v3(59.45,19.25)
  L4-SIG w0.076: v2(51.5,10.3) 51.85,9.95 52.6,9.95 53.3,10.65 54.4,10.65 v5(55.2,11.45)
  Bottom Layer w0.076: v5(55.2,11.45) 56.35,11.45 58.45,13.55 58.45,14.55 v3(58.75,14.85)
  other v2: 58.75,14.85
  other v4: 58.75,14.85 59.15,18.05 59.45,19.25
  other v5: 58.75,14.85
  other v6: 55.2,11.45 58.75,14.85
FPGA-INIT#: R1.1 U1.U11 | length 12.8
  Top Layer w0.076: U1.U11@46.9,8.4 v1(46.9,8.9)
  L3-SIG w0.076: v2(47.9,8.1) v2(49.5,8)
  L4-SIG w0.076: v1(46.9,8.9) v2(47.9,8.1) ; v2(49.5,8) 51.5,6 v5(54.1,6)
  Bottom Layer w0.076: v5(54.1,6) R1.1@57.8,4.55
  other v6: 54.1,6
FPGA-TCK: R4.11 R5.2 U1.C8 | length 95.4
  Top Layer w0.076: v1(44.9,14.9) U1.C8@45.4,15.4 ; R4.11@58.45,19.378 58.522,19.378 59.45,18.45 v3(59.45,18.35)
  L3-SIG w0.076: v2(18.4,14.6) 21.3,13.8 24.6,12.1 v2(26.2,11.7) ; v2(28.7,11.4) 32.1,11.4 38.5,10.2 38.6,10.2 v2(39,10.6) ; v2(42.1,12.5) 43,14.9 43.3,15.3 44.5,15.3 v1(44.9,14.9)
  L4-SIG w0.076: v5(16.4,16.1) 17.9,14.6 v2(18.4,14.6) ; v2(26.2,11.7) v5(26.9,11.2) ; v5(38.3,24.4) 39,25.1 47.3,25.1 49.4,23 51.6,22.8 53.8,22 v5(55.4,20.1) ; v2(39,10.6) 40.8,10.8 42.1,11.9 v2(42.1,12.5)
  Bottom Layer w0.076: v5(16.4,16.1) 16.2,16.3 16.2,17.4 17.2,19.5 20.6,22.9 36.8,22.9 v5(38.3,24.4) ; v5(26.9,11.2) v2(28.7,11.4) ; v5(55.4,20.1) 59.5,17.9 59.9,17.5 ; v3(59.45,18.35) 59.9,17.9 59.9,17.5 ; 59.9,17.5 R5.2@61.4,14.17 59.9,15.67 59.9,17.5
  other v2: 59.45,18.35
  other v4: 59.45,18.35
  other v5: 28.7,11.4 59.45,18.35
  other v6: 26.9,11.2 28.7,11.4 16.4,16.1 59.45,18.35 55.4,20.1 38.3,24.4
FPGA-TDI: R4.14 U1.W10 | length 29.7
  Top Layer w0.076: U1.W10@46.4,7.4 46.325,7.325 46.325,6.375 v1(46.55,6.15) ; v3(57.75,17) 57.772,16.978 R4.14@58.45,16.978 ; v3(58.2,11.35) 58.85,12 v1(58.85,12.5)
  L3-SIG w0.076: v2(47.9,2.7) 47.95,2.75 49.45,2.75 v2(49.5,2.7) ; v2(55.15,6.2) 57.95,9 57.95,10.55 58,10.6 58,11.15 v3(58.2,11.35)
  L4-SIG w0.076: v1(46.55,6.15) 46.95,5.75 46.95,5.35 v5(47.35,4.95) ; v5(47.35,3.95) 47.6,3.7 47.6,3 v2(47.9,2.7) ; v2(49.5,2.7) 49.8,2.4 v5(50.25,2.4) ; v3(57.75,17) 58.1,17 59.1,16 59.1,15.8 59.05,15.75 59.05,14.7 58.85,14.5 v1(58.85,12.5)
  Bottom Layer w0.076: v5(47.35,3.95) v5(47.35,4.95) ; v5(50.25,2.4) 50.25,3.55 50.35,3.65 50.65,3.65 51,4 51,5.1 51.55,5.65 52.65,5.65 53.3,6.3 55.05,6.3 v2(55.15,6.2)
  other v2: 57.75,17
  other v4: 58.2,11.35 57.75,17
  other v5: 55.15,6.2
  other v6: 50.25,2.4 47.35,3.95 47.35,4.95 55.15,6.2
FPGA-TDO: R4.13 U1.W8 | length 29
  Top Layer w0.076: U1.W8@45.4,7.4 45.325,7.325 45.325,6.375 45.5,6.2 v3(45.5,5.15) ; v3(57.6,7.25) 59.4,9.05 v3(59.4,9.4) ; v3(57.6,17.4) 57.978,17.778 R4.13@58.45,17.778
  L3-SIG w0.076: v2(57.45,16.7) 57.45,17.25 v3(57.6,17.4) ; v2(58.1,14.55) 58.5,14.55 59.7,13.35 59.4,13.05 v3(59.4,9.4)
  L4-SIG w0.076: v3(45.5,5.15) 45.8,5.45 v5(46.2,5.45) ; v2(57.45,16.7) 58.1,16.05 v2(58.1,14.55)
  Bottom Layer w0.076: v5(46.2,5.45) 46.35,5.3 47.25,5.3 48.2,6.25 49.05,6.25 49.1,6.3 49.35,6.3 49.7,5.95 52.15,5.95 53.15,6.95 53.4,6.95 53.7,7.25 v3(57.6,7.25)
  other v2: 45.5,5.15 57.6,7.25
  other v4: 45.5,5.15 57.6,7.25 59.4,9.4 57.6,17.4
  other v5: 57.6,7.25
  other v6: 46.2,5.45 57.6,7.25
FPGA-TMS: R4.12 U1.W9 | length 28.1
  Top Layer w0.076: U1.W9@45.9,7.4 45.9,7.55 46.125,7.775 46.125,7.8 46.15,7.825 v3(46.15,8.15) ; v3(47.25,5.55) 47.25,5.35 48,4.6 v3(48.15,4.6) ; v3(57.6,17.8) 58.378,18.578 R4.12@58.45,18.578
  L3-SIG w0.076: v3(48.15,4.6) v2(48.5,4.25) ; v2(49.75,6.05) 49.75,6.3 49.95,6.5 49.95,6.55 51,7.6 v2(51,8.95) ; v2(56.35,14.5) 56.6,14.25 v2(56.6,12.45) ; v2(56.5,17.65) 56.65,17.8 v3(57.6,17.8)
  L4-SIG w0.076: v3(46.15,8.15) 46.7,8.15 47.75,7.1 47.75,6.05 v3(47.25,5.55) ; v2(48.5,4.25) 48.55,4.25 49.1,4.8 49.1,5.4 v2(49.75,6.05) ; v2(51,8.95) 51,9.35 v5(51.5,9.85) ; v5(56.15,10.65) 56.6,11.1 v2(56.6,12.45) ; v2(56.35,14.5) 56.35,14.55 56.5,14.7 v2(56.5,17.65)
  Bottom Layer w0.076: v5(51.5,9.85) 52.8,9.85 53.6,10.65 v5(56.15,10.65)
  other v2: 47.25,5.55 46.15,8.15
  other v4: 48.15,4.6 47.25,5.55 46.15,8.15 57.6,17.8
  other v6: 51.5,9.85 56.15,10.65
FT-PWREN#: U1.P19 U2.60 | length 41.1
  Top Layer w0.076: U2.60@29.725,19.3 29.725,19.9 30.175,20.35 v3(33.35,20.35) ; v3(38.45,20.4) 38.5,20.4 39.85,21.75 46.35,21.75 v3(47.4,22.8) ; v3(48.8,22.8) 49.15,22.45 v3(49.9,22.45) ; U1.P19@50.9,9.9 50.95,9.85 v3(51.25,9.85)
  L3-SIG w0.076: v3(33.35,20.35) v2(33.7,20.7) ; v2(34.5,20.7) 34.8,20.4 v3(38.45,20.4) ; v3(47.4,22.8) 47.55,22.95 48.5,22.95 48.65,22.8 v3(48.8,22.8) ; v3(49.9,22.45) 51,22.45 v2(51.15,22.3) ; v3(51.25,9.85) 52.1,9.85 v2(52.5,10.25) ; v2(53.8,13.1) 53.8,13.15 55.1,14.45 55.1,17.7 55.3,17.9 55.3,18.35 54.15,19.5 54.15,20.05 54,20.2 v2(54,20.5)
  L4-SIG w0.076: v2(33.7,20.7) v2(34.5,20.7) ; v2(51.15,22.3) 52.3,21.15 53.25,21.15 53.9,20.5 v2(54,20.5) ; v2(52.5,10.25) 52.5,11.35 53.8,12.65 v2(53.8,13.1)
  other v4: 51.25,9.85 33.35,20.35 38.45,20.4 49.9,22.45 47.4,22.8 48.8,22.8
FT-REF: R18.2 U2.6 | length 22.4
  Top Layer w0.076: U2.6@25.775,14.85 25.925,14.7 v3(26.8,14.7)
  L3-SIG w0.076: v2(18.4,10) 18.4,6.9 v2(20.3,5.3) ; v2(22.8,15.5) 23.5,14.8 v2(24.4,14.8)
  L4-SIG w0.076: v2(18.4,10) 18.1,10.5 v5(18.9,15.5) ; v2(24.4,14.8) v3(26.8,14.7)
  Bottom Layer w0.076: v5(18.9,15.5) 19.4,16 21.6,16 22.1,15.5 v2(22.8,15.5) ; v2(20.3,5.3) R18.2@21.35,4.25
  other v2: 26.8,14.7
  other v4: 26.8,14.7
  other v5: 20.3,5.3 22.8,15.5
  other v6: 20.3,5.3 18.9,15.5 22.8,15.5
FT-RESETN: R19.1 U2.14 | length 22.5
  Top Layer w0.076: v3(18.15,15.5) 18.15,14.45 18.7,13.9 v1(18.7,12.15) ; v3(20.15,10.6) 20.15,10.35 20.55,9.95 20.8,9.95 21.15,9.95 v3(22.9,8.2) ; U2.14@25.775,10.85 25.85,10.775 26.75,10.775 27.3,10.225 27.3,8.8 v3(27.1,8.6)
  L3-SIG w0.076: v2(26.35,8.85) 26.6,8.6 v3(27.1,8.6)
  L4-SIG w0.076: v5(18.55,10.95) 18.7,11.1 v1(18.7,12.15)
  Bottom Layer w0.076: v3(18.15,15.5) 19.125,16.175 19.125,18.375 R19.1@18.75,18.75 ; v5(18.55,10.95) 18.9,10.6 v3(20.15,10.6) ; v3(22.9,8.2) 23.55,8.85 v2(26.35,8.85)
  other v2: 22.9,8.2 20.15,10.6 18.15,15.5
  other v4: 22.9,8.2 27.1,8.6 20.15,10.6 18.15,15.5
  other v5: 22.9,8.2 26.35,8.85 20.15,10.6 18.15,15.5
  other v6: 22.9,8.2 26.35,8.85 20.15,10.6 18.55,10.95 18.15,15.5
FT-VCORE: C139.2 C152.2 C153.2 C154.2 U2.12 U2.37 U2.49 U2.64 | length 57.3
  Top Layer w0.2: 31.237,10 31.237,17.4 32.4,17.92 35.225,17.92 U2.49@35.225,19.3
  Top Layer w0.26: 31.237,10 36.15,10 36.15,11.85
  Top Layer w0.275: 26.65,11.85 27,11.2
  Top Layer w0.28: 36.15,11.85 U2.37@37.175,11.85
  Top Layer w0.3: U2.12@25.775,11.85 26.65,11.85 ; 27,11.2 28.6,11.2 28.6,18.2 27.725,18.2 U2.64@27.725,19.3 ; v1(30.375,9.05) 30.375,10
  Top Layer w0.4: 28.6,11.2 28.6,10 30.375,10 31.237,10
  L4-SIG w0.39: v1(25.2,2.1) 25.2,3.45
  L4-SIG w0.4: 25.2,3.45 25.45,3.7 32.55,3.7 v1(32.55,4.45)
  Bottom Layer w0.15: 30.35,5.3 30.35,7.05
  Bottom Layer w0.29: 24.75,2.55 v1(25.2,2.1)
  Bottom Layer w0.3: C139.2@24.65,3.05 24.75,2.55 ; C152.2@29.949,3.95 29.949,4.55 ; 30.35,4.55 30.35,5.3 ; 30.35,7.05 v1(30.375,9.05) ; C153.2@31.149,3.95 31.149,4.55 32.349,4.55 ; C154.2@32.349,3.95 32.349,4.55 ; v1(32.55,4.45) 32.349,4.55
  Bottom Layer w0.5: 29.949,4.55 30.35,4.55 31.149,4.55
FT-VPHY: C40.2 L4.1 U2.4 | length 41
  Top Layer w0.15: 24.8,9.45 24.8,11.3 v1(24.65,11.7) 24.8,12.1 24.8,15.85 U2.4@25.775,15.85
  Top Layer w0.3: 24.8,9.45 v1(26.4,8.1)
  L4-SIG w0.37: v1(17.57,2.1) 17.9,3.4
  L4-SIG w0.5: 17.9,3.4 17.9,6.8 18.3,8 19.05,9.5 19.1,11.7 v1(24.65,11.7)
  Bottom Layer w0.15: 35.15,5.3 35.15,7.05
  Bottom Layer w0.3: v1(26.4,8.1) 27.2,8.6 28.2,9.55 35.15,9.55 35.15,7.05 ; C40.2@34.749,3.95 34.749,4.25 35.15,4.55 35.15,5.3
  Bottom Layer w0.37: v1(17.57,2.1) L4.1@17.85,3.05
FT-VPLL: C41.2 L5.1 U2.9 | length 43.8
  Top Layer w0.2: U2.9@25.775,13.35 26.9,13.35 27.45,12.9 v1(27.45,11.625)
  L3-SIG w0.3: 19,3.3 v1(20.12,2.1)
  L3-SIG w0.39: v1(20.12,2.1) 21,3.35
  L3-SIG w0.4: 21,3.35 34.6,3.35 v1(35.2,1.575)
  L3-SIG w0.5: 19,3.3 17.9,4.4 17.9,7.4 17.9,11.1 27.45,11.1 v1(27.45,11.625)
  Bottom Layer w0.15: 35.5,3.5 C41.2@35.949,3.95
  Bottom Layer w0.2: v1(35.2,1.575) 35.5,2.2 35.5,3.5
  Bottom Layer w0.39: v1(20.12,2.1) L5.1@20.65,3.05
GND: C3.1 C4.1 C5.1 C6.1 C7.1 C8.1 C9.1 C11.1 C12.1 C13.1 C38.1 C40.1 C41.1 C78.1 C80.1 C82.1 C84.1 C85.2 C86.2 C87.2 C88.2 C89.2 C90.2 C91.2 C92.2 C93.2 C94.2 C95.2 C96.2 C97.2 C98.2 C99.2 C100.2 C101.2 C102.2 C103.2 C104.2 C105.2 C106.2 C107.2 C108.2 C109.2 C110.2 C111.2 C112.2 C113.2 C114.2 C115.2 C116.2 C117.2 C118.2 C119.2 C120.2 C121.2 C122.2 C133.1 C134.1 C135.1 C136.1 C137.1 C138.1 C139.1 C140.2 C141.2 C142.2 C143.2 C144.2 C145.2 C146.2 C147.1 C148.1 C149.1 C150.1 C151.1 C152.1 C153.1 C154.1 C155.1 C156.1 C157.1 C158.1 C159.1 J1.5 J1.11 JP3.3 L6.1 LD1.K LD2.K Q1.2 R5.1 R11.1 R13.2 R15.1 R17.2 R18.1 R21.1 R22.1 R78.1 R86.1 R102.1 R103.1 R104.1 R105.1 R106.1 U1.A1 U1.A3 U1.A4 U1.A5 U1.A6 U1.A7 U1.A9 U1.A11 U1.A19 U1.B1 U1.B3 U1.B4 U1.B5 U1.B6 U1.B7 U1.B9 U1.B11 U1.B14 U1.C1 U1.C2 U1.C3 U1.C4 U1.C5 U1.C6 U1.C7 U1.C10 U1.C19 U1.D3 U1.E1 U1.E2 U1.E3 U1.E17 U1.F1 U1.F2 U1.F3 U1.F19 U1.G1 U1.G7 U1.G8 U1.G9 U1.G11 U1.H7 U1.H8 U1.H9 U1.H11 U1.H12 U1.H18 U1.J8 U1.J9 U1.J11 U1.J12 U1.K8 U1.L8 U1.L9 U1.L11 U1.L19 U1.M9 U1.M13 U1.N9 U1.N12 U1.N13 U1.P2 U1.T19 U1.U6 U1.U9 U1.V18 U1.W1 U1.W12 U2.1 U2.5 U2.10 U2.11 U2.13 U2.15 U2.25 U2.35 U2.47 U2.51 U3.6 U3.12 U3.28 U3.41 U3.46 U3.52 U3.54 U4.4 U5.2 U6.2 U7.2 U8.4 U8.6 U8.8 U8.17 U10.5 X1.5 X1.MH1 X1.MH2 X1.MP1 X1.MP2 X1.MP3 X1.MP4 X1.MS1 X1.MS2 X2.1 X2.17 X2.21 X3.6 X3.G1 X3.G2 X3.G3 X3.G4 X4.2 | length 271.4
  Top Layer w0.076: U2.5@25.775,15.35 v3(26.8,15.15) ; 37.93,9.47 38.056,9.622 38.18,9.78 ; v1(40.9,10.15) 42.15,10.15 U1.P2@42.4,9.9 ; U1.A11@46.9,16.4 47.15,16.65 48.15,16.65 48.15,16.15 U1.B14@48.4,15.9 ; U1.V18@50.4,7.9 50.65,7.65 v3(50.65,6.35) ; U1.H18@50.4,12.9 50.65,13.15 v3(51.9,13.15)
  Top Layer w0.1: U2.13@26.5,11.35 26.7,11.15 26.7,11 27.6,10.55
  Top Layer w0.105: 36.65,9.47 37.93,9.47
  Top Layer w0.11: U2.25@31.8,8.6 32,8.85
  Top Layer w0.13: U2.35@37.85,10.85 38.14,10.6 38.14,9.95
  Top Layer w0.14: 23.57,11.75 23.57,11.95 LD1.K@23.76,12.2 ; 38.14,9.95 38.18,9.78
  Top Layer w0.145: 32,8.85 v1(32.475,9.025)
  Top Layer w0.15: v1(23.25,10.575) 23.15,10.9 23.15,11.6 23.57,11.75 ; v1(41.4,6.9) U1.W1@41.9,7.4 ; U1.C3@42.9,15.4 v1(43.4,14.9) ; v1(44.4,13.9) U1.G7@44.9,13.4 ; v1(45.9,14.9) U1.C10@46.4,15.4 ; U1.N13@47.9,10.4 v3(48.4,9.9) ; v1(48.9,13.9) 49.4,14.4
  Top Layer w0.18: U2.47@37.85,16.85 38.175,17.125
  Top Layer w0.2: v1(40.9,13.4) U1.G1@41.9,13.4 ; v1(41.4,14.4) U1.E1@41.9,14.4 ; v1(41.4,15.4) U1.C1@41.9,15.4 ; v1(41.4,15.9) U1.B1@41.9,15.9 ; v1(41.4,16.4) U1.A1@41.9,16.4 U1.B1@41.9,15.9 ; v1(43.4,14.4) U1.E3@42.9,14.4 ; v1(43.9,14.9) U1.C5@43.9,15.4 ; U1.U6@44.4,8.4 v1(44.4,8.9) ; v1(44.4,12.9) U1.H7@44.9,12.9 ; v1(44.4,13.4) U1.G7@44.9,13.4 ; v1(44.4,14.9) U1.C6@44.4,15.4 ; v1(44.9,13.9) U1.G7@44.9,13.4 ; v1(45.4,13.9) U1.G8@45.4,13.4 ; U1.U9@45.9,8.4 v3(45.9,8.9) ; v3(45.9,9.9) U1.N9@45.9,10.4 U1.M9@45.9,10.9 U1.L9@45.9,11.4 ; v1(45.9,13.9) U1.G9@45.9,13.4 ; U1.A9@45.9,16.4 U1.B9@45.9,15.9 U1.C10@46.4,15.4 U1.B11@46.9,15.9 U1.A11@46.9,16.4 ; U1.L11@46.9,11.4 v3(46.9,11.9) U1.J11@46.9,12.4 ; v3(46.9,13.9) U1.G11@46.9,13.4 U1.H11@46.9,12.9 ; v1(47.4,6.25) U1.W12@47.4,7.4 ; v1(47.4,9.9) U1.N12@47.4,10.4 U1.N13@47.9,10.4 ; v3(47.9,9.9) U1.N13@47.9,10.4 ; U1.M13@47.9,10.9 U1.N13@47.9,10.4 ; v3(48.4,10.4) U1.N13@47.9,10.4 ; 49.4,14.4 U1.E17@49.9,14.4 ; U1.T19@50.9,8.9 v3(51.9,8.9) ; U1.L19@50.9,11.4 v1(51.4,11.4) ; U1.F19@50.9,13.9 v1(51.4,13.9) ; U1.C19@50.9,15.4 v3(51.4,15.4) ; U1.A19@50.9,16.4 v3(51.4,16.4) ; U1.E1@41.9,14.4 U1.F1@41.9,13.9 U1.F2@42.4,13.9 U1.F3@42.9,13.9 ; U1.E1@41.9,14.4 U1.E2@42.4,14.4 U1.E3@42.9,14.4 ; U1.C1@41.9,15.4 U1.C2@42.4,15.4 U1.C3@42.9,15.4 ; U1.C1@41.9,15.4 U1.B1@41.9,15.9 ; U1.F3@42.9,13.9 U1.E3@42.9,14.4 ; U1.F3@42.9,13.9 U1.E3@42.9,14.4 ; U1.E3@42.9,14.4 U1.D3@42.9,14.9 ; U1.D3@42.9,14.9 U1.C3@42.9,15.4 ; U1.D3@42.9,14.9 v1(43.4,14.9) U1.C4@43.4,15.4 ; U1.C3@42.9,15.4 U1.B3@42.9,15.9 ; U1.C3@42.9,15.4 U1.C4@43.4,15.4 ; U1.B3@42.9,15.9 U1.B4@43.4,15.9 ; U1.B3@42.9,15.9 U1.A3@42.9,16.4 U1.A4@43.4,16.4 ; U1.C4@43.4,15.4 U1.B4@43.4,15.9 ; U1.C4@43.4,15.4 U1.C5@43.9,15.4 ; U1.B4@43.4,15.9 U1.B5@43.9,15.9 ; U1.B4@43.4,15.9 U1.A4@43.4,16.4 ; U1.A4@43.4,16.4 U1.A5@43.9,16.4 ; U1.C5@43.9,15.4 U1.B5@43.9,15.9 ; U1.C5@43.9,15.4 U1.C6@44.4,15.4 ; U1.B5@43.9,15.9 U1.B6@44.4,15.9 ; U1.B5@43.9,15.9 U1.A5@43.9,16.4 ; U1.A5@43.9,16.4 U1.A6@44.4,16.4 ; U1.C6@44.4,15.4 U1.B6@44.4,15.9 ; U1.C6@44.4,15.4 U1.C7@44.9,15.4 ; U1.C6@44.4,15.4 U1.C7@44.9,15.4 ; U1.B6@44.4,15.9 U1.B7@44.9,15.9 ; U1.B6@44.4,15.9 U1.A6@44.4,16.4 ; U1.A6@44.4,16.4 U1.A7@44.9,16.4 U1.B7@44.9,15.9 ; U1.H7@44.9,12.9 U1.H8@45.4,12.9 ; U1.H7@44.9,12.9 U1.G7@44.9,13.4 ; U1.G7@44.9,13.4 U1.G8@45.4,13.4 ; U1.C7@44.9,15.4 U1.B7@44.9,15.9 ; U1.J8@45.4,12.4 U1.K8@45.4,11.9 U1.L8@45.4,11.4 U1.L9@45.9,11.4 ; U1.J8@45.4,12.4 U1.J9@45.9,12.4 ; U1.J8@45.4,12.4 U1.H8@45.4,12.9 ; U1.H8@45.4,12.9 U1.H9@45.9,12.9 ; U1.H8@45.4,12.9 U1.G8@45.4,13.4 ; U1.G8@45.4,13.4 U1.G9@45.9,13.4 ; U1.L9@45.9,11.4 v1(45.9,11.9) U1.J9@45.9,12.4 ; U1.J9@45.9,12.4 U1.H9@45.9,12.9 ; U1.H9@45.9,12.9 U1.G9@45.9,13.4 ; U1.J11@46.9,12.4 U1.J12@47.4,12.4 U1.H12@47.4,12.9 U1.H11@46.9,12.9 ; U1.J11@46.9,12.4 U1.H11@46.9,12.9
  Top Layer w0.21: 38.175,17.125 38.175,18.2
  Top Layer w0.22: U2.13@25.775,11.35 U2.13@26.5,11.35
  Top Layer w0.24: v1(36.1,8.7) 36.65,9.47
  Top Layer w0.245: 34.225,20.32 34.7,20.32 X1.MH2@35.52,21.258
  Top Layer w0.26: v1(25.1,20.8) 25.1,17.35 U2.1@25.775,17.35 ; U2.11@26.5,12.35 v1(27.025,12.125)
  Top Layer w0.27: U2.25@31.725,7.9 U2.25@31.8,8.6
  Top Layer w0.28: LD1.K@23.76,12.2 LD1.K@24.15,12.585 ; U2.15@25.775,10.35 26.5,10.35 26.975,10.15 v1(26.975,9) ; U2.11@25.775,12.35 U2.11@26.5,12.35 ; U2.10@25.775,12.85 26.5,12.85 v1(27.025,12.125) ; 27.6,10.55 27.6,9.3 v1(28.4,9.05) ; U2.51@34.225,19.3 34.225,20.32 ; U2.35@37.175,10.85 U2.35@37.85,10.85 ; U2.47@37.175,16.85 U2.47@37.85,16.85 ; 38.175,18.2 v1(38.35,18.4)
  Top Layer w0.3: v1(17.525,16.725) C158.1@18.1,16.95 ; C159.1@23.6,7.5 v1(23.6,7.95) ; C155.1@26.3,20.25 v1(26.3,20.675) ; C157.1@39.35,18 v1(39.35,18.425) ; v1(43.175,18.125) U4.4@43.85,17.495
  Top Layer w0.365: Q1.2@40.45,18.65 v1(41.5,19.85)
  Top Layer w0.38: v1(14.025,17.06) X3.G4@14.025,18.125
  Top Layer w0.4: v1(12.975,7.1) X3.G1@14.025,6.775 ; X1.MH1@30.52,21.258 X1.5@31.72,21.258
  Top Layer w0.425: v3(51.9,6.4) 52,7.2
  Top Layer w0.43: C93.2@53,17.449 v1(53.85,18.4)
  Top Layer w0.465: v3(51.9,13.15) 51.95,13.45
  Top Layer w0.5: X3.G3@5.775,18.475 v1(6.15,17.75) ; X3.G2@6.425,6.525 v1(6.425,7.225) ; X3.6@14.15,10.175 v1(15.325,10.175) ; LD1.K@24.15,12.585 LD2.K@24.15,13.785 ; X1.MS1@29.52,23.959 X1.MP2@32.02,23.959 ; v1(32.55,2.25) X4.2@33.4,3.05 ; X1.MP3@34.02,23.959 X1.MS2@36.52,23.959 ; 51.95,13.45 C146.2@53,14.149 ; 52,7.2 C140.2@53,7.55 C141.2@54.8,7.55 C142.2@56.6,7.55 ; C143.2@53,10.849 C144.2@54.8,10.849 C145.2@56.6,10.849 v1(57.65,10.6) ; C85.2@54.8,14.149 C86.2@56.6,14.149 v1(57.65,14.149) ; C97.2@54.8,17.449 v1(54.8,18.4) ; C98.2@56.6,17.449 v1(56.6,18.4)
  L4-SIG w0.076: v5(44.05,2.22) 46.4,2.22 v1(46.575,3.225)
  L4-SIG w0.3: v1(9.8,9.7) v1(12.98,8.6)
  Bottom Layer w0.076: v1(40.7,1.55) 40.7,2.2 42.15,2.2 42.15,3.6 R13.2@41.95,3.95 ; R15.1@43.75,3.95 43.47,3.671 43.47,2.47 43.8,2.47 v5(44.05,2.22)
  Bottom Layer w0.1: 21.6,3.45 21.6,3.65 22.15,3.65 C133.1@22.15,3.95 ; C135.1@24.55,3.95 24.55,3.65 25.75,3.65 26.95,3.65 C137.1@26.95,3.95 ; C152.1@29.349,3.95 29.35,3.65 30.5,3.65 31.75,3.65 C154.1@31.749,3.95
  Bottom Layer w0.105: R11.1@45.95,2.75 v1(46.575,3.225)
  Bottom Layer w0.11: 41.425,10.675 42.275,10.675 ; 43.8,7.3 43.8,6.55 45.65,6.55 v1(45.75,6.45)
  Bottom Layer w0.115: 29.54,4.3 29.54,5.55
  Bottom Layer w0.13: 29.54,5.55 U3.12@29.95,6.17 ; C154.1@31.749,3.95 C6.1@32.55,3.05 ; v1(40.9,10.15) 41.125,10.375
  Bottom Layer w0.145: 42.275,10.675 42.45,10.75
  Bottom Layer w0.15: v1(21.6,2.316) 21.6,3.45 ; v1(44.4,10.4) 44.97,10.4 C90.2@44.97,11.05 ; v1(44.9,13.9) C96.2@44.97,14.45 ; C92.2@45.6,14.45 v1(45.9,13.9) ; C89.2@47.19,11.05 47.4,10.84 v1(47.4,9.9) ; v1(48.4,11.4) 49.41,11.4 C91.2@49.41,11.05 ; v1(48.9,13.9) C95.2@49.41,14.45
  Bottom Layer w0.16: 43.8,7.3 44.97,7.3
  Bottom Layer w0.18: 42.45,10.75 C108.2@42.75,11.05
  Bottom Layer w0.205: 37.15,18.26 v1(37.775,18.475)
  Bottom Layer w0.21: C106.2@42.55,22.85 43,23.35 ; 44.97,7.3 C109.2@44.97,7.65 ; 49.25,6.8 49.25,7.3
  Bottom Layer w0.23: v1(25.6,1.8) C3.1@25.65,3.05 ; C40.1@34.149,3.95 C7.1@34.85,3.05
  Bottom Layer w0.24: 9.5,6.65 U8.8@10.1,6.65 10.45,6.65 ; U8.6@10.1,5.65 10.45,5.65 ; U8.4@10.75,4.5 10.75,4.95
  Bottom Layer w0.255: C152.1@29.349,3.95 29.54,4.3
  Bottom Layer w0.26: C7.1@34.85,3.05 C41.1@35.349,3.95
  Bottom Layer w0.265: 53.55,4.22 v1(54.3,4.8)
  Bottom Layer w0.28: 49.25,7.3 49.41,7.45
  Bottom Layer w0.29: v1(46.575,3.225) R17.2@46.75,3.95
  Bottom Layer w0.295: v1(46.575,3.225) 47.3,3.05
  Bottom Layer w0.3: v1(5.535,3.9) R78.1@6.2,3.9 ; v1(10.15,4.55) U8.4@10.75,4.5 ; R106.1@14.001,3.147 v1(14.667,3.147) ; R103.1@14.1,10.1 C150.1@14.002,8.7 v1(15.3,8.6) ; R102.1@15.151,4.349 v1(15.817,4.349) ; R105.1@15.151,5.55 v1(15.817,5.55) ; R104.1@16.453,6.752 v1(17.103,6.752) ; C139.1@23.35,3.05 C134.1@23.35,3.95 ; v1(25.4,1.2) v1(25.6,1.8) ; C3.1@25.65,3.05 25.75,3.65 C136.1@25.75,3.95 ; C4.1@27.95,3.05 C138.1@28.15,3.95 ; v1(29.525,20.4) C156.1@29.85,20 ; C5.1@30.25,3.05 30.5,3.65 C153.1@30.549,3.95 ; v1(32.4,1.575) v1(32.55,2.25) ; C6.1@32.55,3.05 C38.1@32.949,3.95 ; U3.52@37.15,17.53 37.15,18.26 ; v1(38.35,18.4) U3.54@38.75,17.53 ; 41.125,10.375 41.425,10.675 ; C106.2@42.05,22.4 C106.2@42.55,22.85 ; C113.2@42.75,7.65 42.75,7.3 43.8,7.3 ; C112.2@42.75,14.45 v1(43.4,14.4) ; C120.2@42.75,17.85 v1(43.175,18.125) ; 43,23.35 v1(43.18,23.6) ; C117.2@44.97,17.85 v1(44.975,18.3) ; C107.2@47.19,7.65 47.4,7 v1(47.4,6.25) ; C116.2@47.19,17.85 v1(47.2,18.3) ; v1(49.05,6.6) 49.25,6.8 ; 49.41,7.45 C110.2@49.41,7.65 ; C118.2@49.41,17.85 v1(49.85,17.85) ; v1(51.4,11.4) C111.2@51.63,11.05 ; v1(51.4,13.9) C114.2@51.63,14.45 ; C115.2@51.63,7.65 v1(51.9,8.1) ; R22.1@53.55,3.95 53.55,4.22 ; C122.2@53.85,7.65 v1(58.45,7.65) ; C119.2@53.85,11.05 v1(57.65,11.05) ; C121.2@53.85,14.45 v1(57.65,14.6) ; v1(60.1,14.17) R5.1@60.8,14.17
  Bottom Layer w0.36: R18.1@20.05,4.25 v1(20.7,3.85)
  Bottom Layer w0.37: 17.95,16.7 v1(18.56,16.18)
  Bottom Layer w0.38: C12.1@6.95,21.39 v1(6.95,22.14)
  Bottom Layer w0.4: v1(3.906,13.952) C80.1@3.906,14.952 ; C82.1@5.154,7.058 v1(5.454,5.779) ; v1(8.92,3.1) C151.1@9.8,3.398 ; v1(8.92,3.75) C151.1@9.8,3.398 ; v1(9.8,2.58) C151.1@9.8,3.398 ; C78.1@9.8,8.651 v1(9.8,9.7) ; v1(10.15,4.55) C151.1@9.8,3.398 ; 10.45,5.65 U8.17@10.75,5.65 ; 10.45,6.65 10.75,6.65 U8.17@11.5,5.9 U8.17@10.75,5.65 ; 10.75,4.95 U8.17@10.75,5.65 ; v1(11.05,15.542) C84.1@12.15,15.542 ; v1(12.98,8.6) C150.1@14.002,8.7 ; v1(17.1,3.9) C9.1@17.75,4.25 ; v1(23.1,2.25) C139.1@23.35,3.05 ; v1(27.215,21.9) U10.5@27.215,22.505 ; C4.1@27.95,3.05 v1(28.52,2.43) ; v1(34.3,2) C7.1@34.85,3.05 ; C87.2@45.15,22.4 45.45,22.75 45.72,23.3 v1(45.72,23.6) ; v1(50.8,23.6) 50.8,23.3 51.05,22.75 C94.2@51.349,22.4
  Bottom Layer w0.41: v1(34.475,9) 34.475,7 U3.6@34.75,6.17
  Bottom Layer w0.45: 17.95,16.7 U3.28@17.95,17.53 ; v1(28.14,16.66) U3.41@28.35,17.53 ; v1(32.35,16.575) U3.46@32.35,17.53 ; v1(45.15,20.25) C101.2@45.15,21.1 ; 47.3,3.05 L6.1@48.05,3.05 ; v1(48.25,20.3) C102.2@48.249,21.1 ; C88.2@48.249,22.4 v1(48.26,23.6) ; R21.1@50.25,4.25 v1(50.25,4.975) ; v1(51.35,19.475) C103.2@51.349,21.1
  Bottom Layer w0.5: C13.1@1.75,21.44 v1(1.75,22.25) ; C80.1@3.906,14.952 3.906,15.502 v1(5.968,15.502) v1(6.408,15.502) ; C11.1@4.65,21.39 v1(4.65,22.15) ; v1(4.704,9.75) v1(4.704,9.31) ; C82.1@5.154,7.058 4.704,7.058 v1(4.704,8.87) v1(4.704,9.31) ; C147.1@6.348,12.651 U5.2@6.408,14.252 v1(6.408,15.502) ; v1(6.848,15.502) v1(6.408,15.502) ; C148.1@7.555,9.25 U6.2@5.954,9.31 v1(4.704,9.31) ; 9.5,6.65 v1(9.5,7.35) 9.5,8.651 C78.1@9.8,8.651 ; C149.1@9.748,13.35 U7.2@11.35,13.29 v1(12.6,13.29) ; C84.1@12.15,15.542 12.6,15.542 v1(12.6,13.73) v1(12.6,13.29) ; v1(12.6,12.85) v1(12.6,13.29) ; X1.MH1@30.52,21.258 R86.1@31.9,21.45 ; v1(32.55,2.25) C6.1@32.55,3.05 ; C8.1@37.15,3.05 v1(37.15,4) ; C100.2@42.05,21.1 C106.2@42.05,22.4 ; C104.2@54.449,21.1 v1(54.45,20.3) ; C99.2@54.449,22.4 v1(55.45,23) ; C105.2@57.549,21.1 v1(57.55,20.3)
  other v4: 26.8,15.15
  other v6: 44.05,2.22
GNDADC: C123.2 C124.2 L6.2 U1.A12 U1.A13 U1.B12 U1.B13 U1.C12 | length 16.7
  Top Layer w0.15: v1(46.9,14.9) U1.C12@47.4,15.4
  Top Layer w0.2: U1.C12@47.4,15.4 U1.B12@47.4,15.9 ; U1.B12@47.4,15.9 U1.B13@47.9,15.9 U1.A13@47.9,16.4 U1.A12@47.4,16.4 U1.B12@47.4,15.9
  L4-SIG w0.15: v1(46.9,14.9) 46.9,14.75 46.75,14.6 46.75,12.87 47.72,11.9 47.72,10.98 48.25,10.45 48.25,8.25 48.35,8.15 v1(48.35,5)
  Bottom Layer w0.285: v1(48.35,5) C124.2@49.25,4.25
  Bottom Layer w0.3: C123.2@46.85,14.45 v1(46.9,14.9)
  Bottom Layer w0.4: C124.2@49.25,4.25 L6.2@49.65,3.05
JA1: R26.1 U1.U18 | length 14.2
  Top Layer w0.076: U1.U18@50.4,8.4 50.65,8.65 50.65,9 50.8,9.15 51.2,9.15 v3(51.3,9.25)
  L4-SIG w0.076: v3(51.3,9.25) 52,8.55 v5(52.4,8.55) ; v5(59.1,7.9) 59.5,7.9 v1(61.35,6.2)
  Bottom Layer w0.076: v5(52.4,8.55) 52.55,8.4 56.85,8.4 v5(59.1,7.9) ; v1(61.35,6.2) R26.1@62.85,5.65
  other v2: 51.3,9.25
  other v4: 51.3,9.25
  other v6: 59.1,7.9 52.4,8.55
JA2: R27.1 U1.U19 | length 8
  Top Layer w0.076: U1.U19@50.9,8.4 v3(51.7,8.5)
  L3-SIG w0.076: v3(51.7,8.5) v2(52.8,8.9)
  Bottom Layer w0.076: v2(52.8,8.9) 58.2,8.8 R27.1@58.75,8.49
  other v4: 51.7,8.5
  other v5: 52.8,8.9
  other v6: 52.8,8.9
JA3: R28.1 U1.W18 | length 13
  Top Layer w0.076: U1.W18@50.4,7.4 50.325,6.225 50.85,5.7 v3(52,5.7)
  L3-SIG w0.076: v2(54.1,5.5) 55.7,5.5 v2(57,6.8)
  L4-SIG w0.076: v3(52,5.7) v2(54.1,5.5) ; v5(58.4,7) v5(59.3,7)
  Bottom Layer w0.076: v2(57,6.8) v5(58.4,7) ; v5(59.3,7) R28.1@60.8,8.49
  other v2: 52,5.7
  other v4: 52,5.7
  other v5: 57,6.8
  other v6: 57,6.8 58.4,7 59.3,7
JA4: R29.1 U1.C17 | length 20.9
  Top Layer w0.076: U1.C17@49.9,15.4 50.15,15.65 v1(50.15,16.78) ; v3(50.15,13.15) 50.15,12.3 50.3,12.15 50.5,12.15 50.65,12 50.65,11.8 50.8,11.65 51.2,11.65 51.25,11.7 51.35,11.7 51.4,11.75 51.5,11.75 51.75,11.5 52.05,11.5 52.2,11.65 57.5,11.65 58.35,10.8 59.4,10.8 60.35,9.85 61.7,9.85 v1(62.45,9.1)
  L3-SIG w0.076: v2(49.95,14.75) 49.85,14.85 49.85,15.45 50.025,15.625 50.025,16.655 v1(50.15,16.78) ; v2(50.05,13.7) 50.15,13.6 v3(50.15,13.15)
  L4-SIG w0.076: v2(49.95,14.75) 50.05,14.65 v2(50.05,13.7)
  Bottom Layer w0.076: v1(62.45,9.1) 62.85,8.7 R29.1@62.85,8.49
  other v4: 50.15,13.15
JA7: R30.2 U1.R19 | length 11.8
  Top Layer w0.076: U1.R19@50.9,9.4 52.225,9.95 53.8,9.95 53.9,9.85 53.9,8.45 54,8.35 57.4,8.35 v3(58.25,9.2)
  L4-SIG w0.076: v3(58.25,9.2) v5(59.4,10.75)
  Bottom Layer w0.076: R30.2@59.35,11.33 v5(59.4,10.75)
  other v2: 58.25,9.2
  other v4: 58.25,9.2
  other v6: 59.4,10.75